# Altium PCB PowerBoardPCBRev1.PcbDoc
Units mm, origin at the board's own origin, x right, y up, seen from the top; angles counter-clockwise.
Board outline 40 x 40 mm, 2 copper layers (Top Layer, Bottom Layer); 8 components, 12 nets, 39 pads, 0 vias.
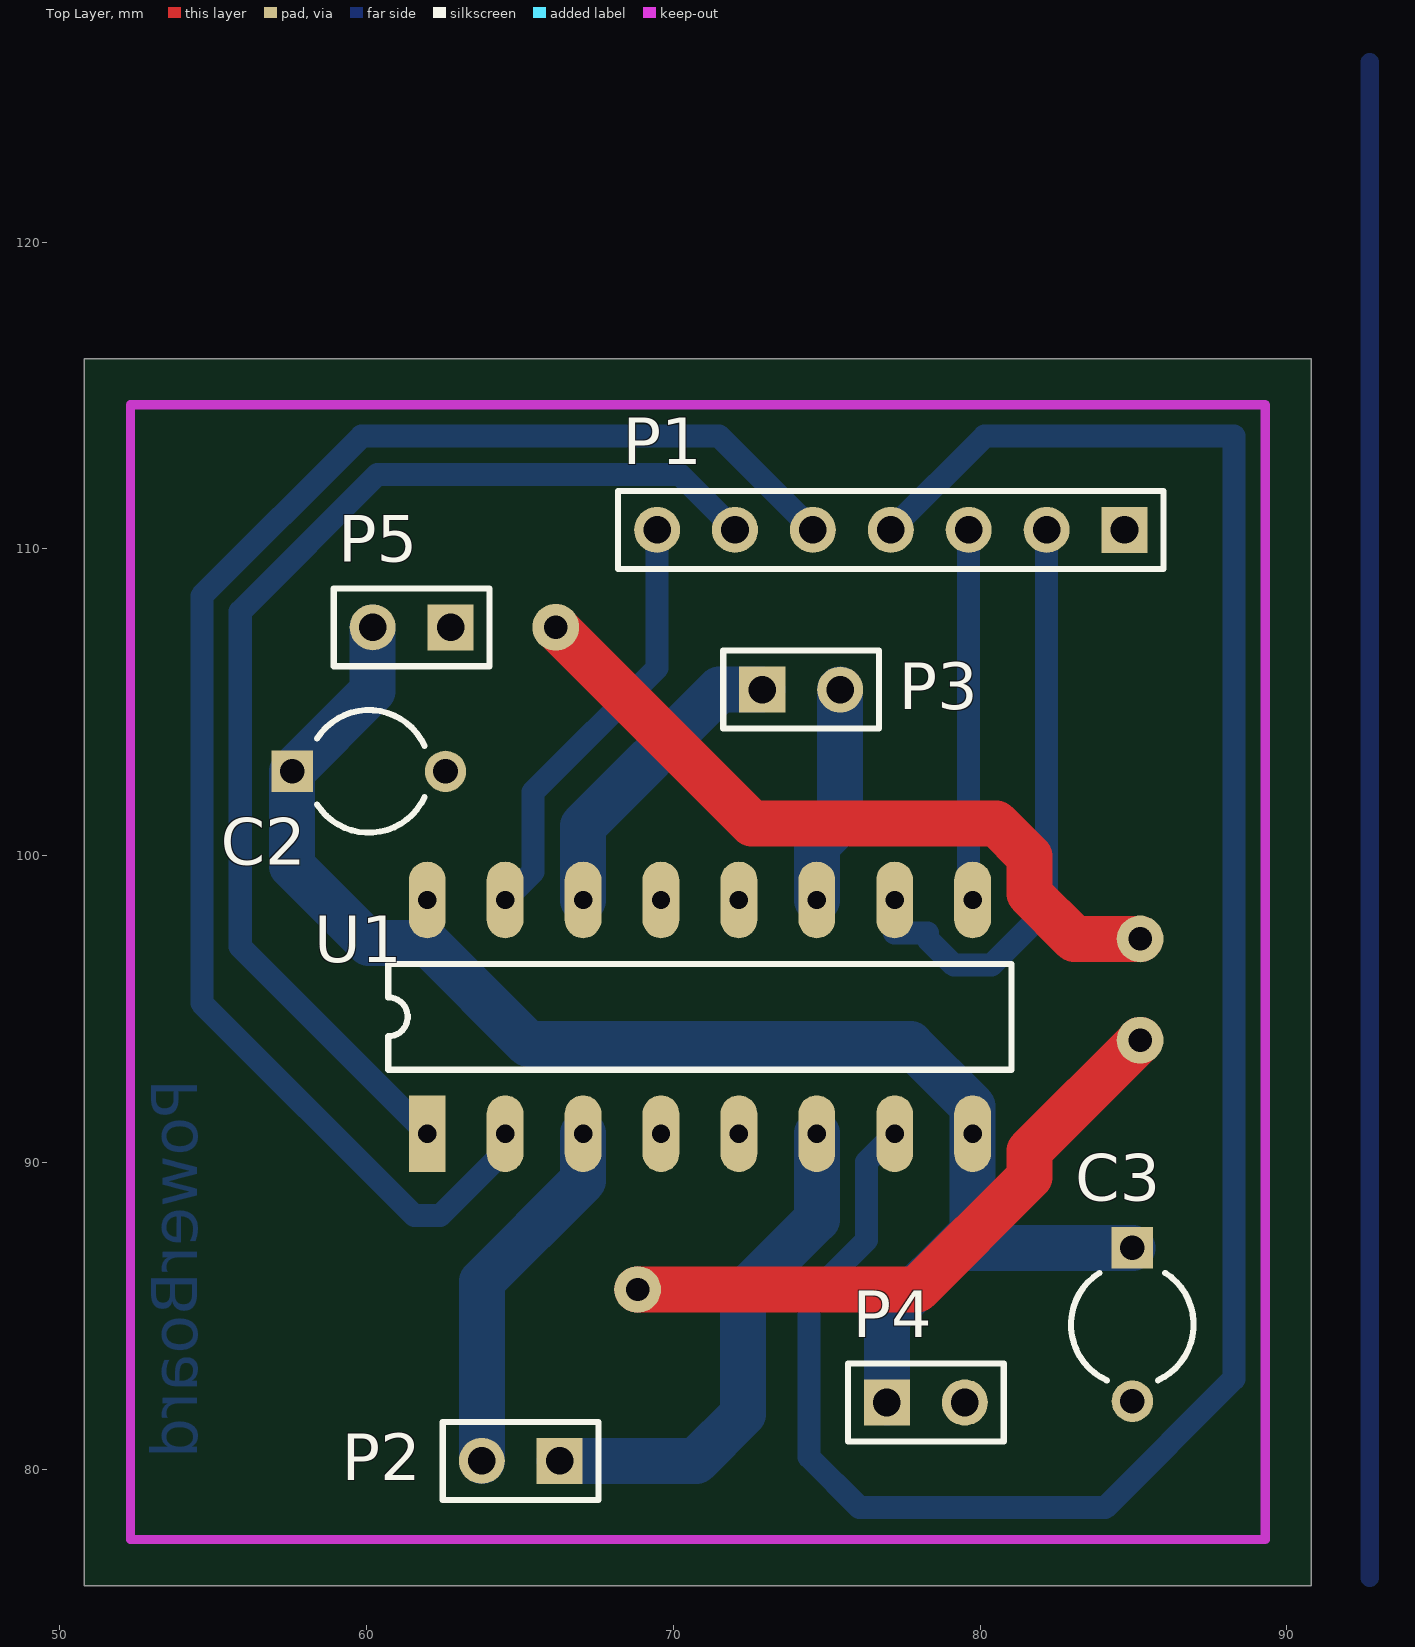
[diagram p0: Top Layer view]
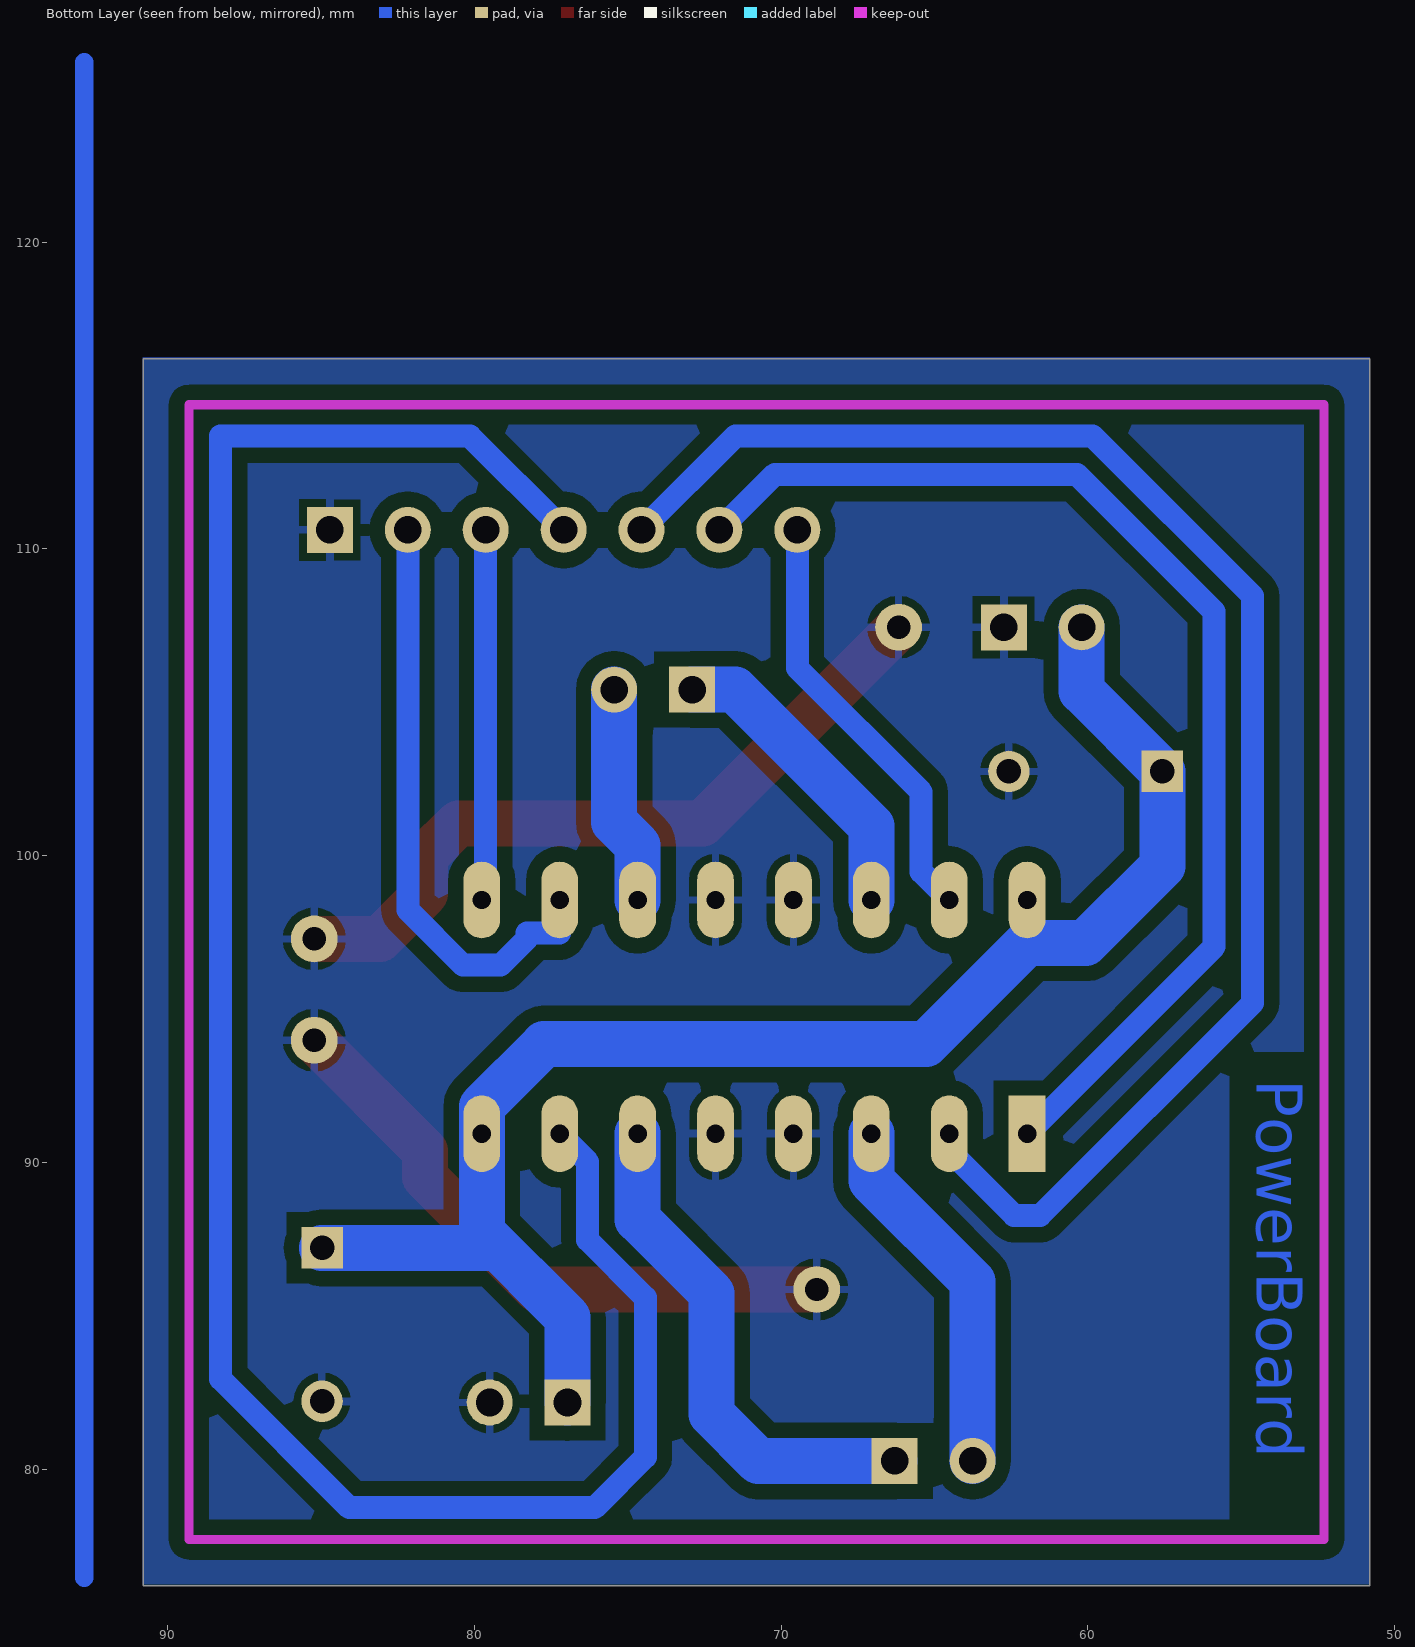
[diagram p1: Bottom Layer view, seen from below]

## Layer stack, top to bottom
Top Solder: solder mask 0.0102, Solder Resist, Dk 3.5
Top Layer: signal copper 0.0356
Dielectric 1: dielectric 0.32, FR-4, Dk 4.8
Bottom Layer: signal copper 0.0356
Bottom Solder: solder mask 0.0102, Solder Resist, Dk 3.5

## Board outline
50.8,76.2 90.8,76.2 90.8,116.2 50.8,116.2

## Design rules (kind name [scope] priority, off if disabled: settings)
Clearance [All] p1: gap=0.5
PolygonConnect [All] p1: connectstyle=Relief reliefconductorwidth=0.254 reliefentries=4 polygonreliefangle="90 Angle" airgapwidth=0.254
RoutingVias [All] p1: holewidth=0.8 width=1.6 viastyle="Through Hole" minholewidth=0.711 minwidth=1.27 maxholewidth=0.711 maxwidth=1.27
SolderMaskExpansion [All] p1: expansion=0.102
Width [All] p1: maxlimit=1.5 minlimit=0.6 preferedwidth=0.75
30 further rules are at their usual default settings.

## Components (designator, comment, footprint, x,y, rotation, side; value= is the part's Value field where it differs from the comment)
C2 "1uF" CAPR5-4X5 60.071,102.743 r0 top
C3 "1uF" CAPR5-4X5 84.963,84.709 r270 top
P1 "POWERBOARD_HEADER" HDR1X7 84.709,110.617 r180 top
P2 "LEFT_MOTOR_CONNECTOR" HDR1X2 66.294,80.264 r180 top
P3 "RIGHT_MOTOR_CONNECTOR" HDR1X2 72.898,105.41 r0 top
P4 "V_BAT" HDR1X2 76.962,82.169 r0 top
P5 "V_EXT_CONNECTOR" HDR1X2 62.738,107.442 r180 top
U1 "L293DNE Motor Driver" "DIP16 (NE)" 61.976,90.932 r90 top

## Footprints (in the part's own frame and the unit in brackets; to place one, negate y for a bottom-side part, rotate by r counter-clockwise, add the part's x,y. Pads: shape width x height; smd on the part's side, far side on the other; paste and mask are expansions set on the pad)
CAPR5-4X5 [mm] "Capacitor; 2 Leads"
  rect 1.35x1.35 hole 0.8: 1(-2.5,0)
  round 1.35 hole 0.8: 2(2.5,0)
  silkscreen extent -1.69,-2 1.82,2
"DIP16 (NE)" [mm]
  rect 2.5x1.2 hole 0.6: 1(0,0)
  oval 2.5x1.2 hole 0.6: 2(0,-2.54) 3(0,-5.08) 4(0,-7.62) 5(0,-10.16) 6(0,-12.7) 7(0,-15.24) 8(0,-17.78) 9(7.62,-17.78) 10(7.62,-15.24) 11(7.62,-12.7) 12(7.62,-10.16) 13(7.62,-7.62) 14(7.62,-5.08) 15(7.62,-2.54) 16(7.62,0)
  silkscreen extent 2.08,-19.05 5.54,1.27
HDR1X2 [mm] "Connector; Header; 2 Position"
  rect 1.5x1.5 hole 0.9: 1(0,0)
  round 1.5 hole 0.9: 2(2.54,0)
  silkscreen extent -1.27,-1.27 3.81,1.27
HDR1X7 [mm] "Connector; Header; 7 Position"
  rect 1.5x1.5 hole 0.9: 1(0,0)
  round 1.5 hole 0.9: 2(2.54,0) 3(5.08,0) 4(7.62,0) 5(10.16,0) 6(12.7,0) 7(15.24,0)
  silkscreen extent -1.27,-1.27 16.51,1.27

## Part data
C2 C3: library part Cap2, "Capacitor"
P1: library part "Header 7", "Header, 7-Pin"
P2 P3 P4 P5: library part "Header 2", "Header, 2-Pin"
U1: library part L293DNE, "TI L293DNE Quad H-bridge Motor Driver"

## Free pads (board coordinates)
  round 1.524 hole 0.762: 2(66.167,107.442) 2(68.834,85.852) 2(85.217,93.98) 2(85.217,97.282)

## Nets (pads, with @x,y where several pads share a name; then routed paths per layer and width w, separated by ;. In a path a pad name is that pad's centre, name@x,y a point inside that pad or via, vN(x,y) a via of type N, cw(c..) or ccw(c..) an arc to the next point about the centre after c; other vN are vias at no path point)
GND: C2.2 C3.2 P1.1 P4.2 P5.1 pad.2 U1.4 U1.5 U1.12 U1.13 | length 44.2
  Top Layer w1.5: pad.2@66.167,107.442 72.557,101.052 80.522,101.052 81.606,99.968 81.606,98.755 83.079,97.282 pad.2@85.217,97.282 ; pad.2@68.834,85.852 77.942,85.852 81.606,89.516 81.606,90.369 pad.2@85.217,93.98
LEFT_EN: P1.6 U1.1 | length 38.3
  Bottom Layer w0.75: U1.1 55.88,97.028 55.88,107.95 60.355,112.425 70.201,112.425 P1.6
MOTORSIG_LF: P1.5 U1.2 | length 51
  Bottom Layer w0.75: U1.2 64.726,90.722 64.726,90.595 62.396,88.265 61.556,88.265 54.63,95.191 54.63,108.468 59.837,113.675 71.491,113.675 P1.5
MOTORSIG_LR: P1.4 U1.7 | length 71.2
  Bottom Layer w0.75: P1.4 80.147,113.675 88.275,113.675 88.275,82.941 84.074,78.74 76.073,78.74 74.422,80.391 74.422,85.586 76.301,87.465 76.301,90.017 U1.7
MOTORSIG_RF: P1.7 U1.15 | length 14.1
  Bottom Layer w0.75: U1.15 65.431,99.467 65.431,102.077 69.469,106.115 P1.7
MOTORSIG_RR: P1.2 U1.10 | length 20.1
  Bottom Layer w0.75: U1.10@77.216,98.933 U1.10 77.216,97.477 78.281,97.477 78.281,97.291 79.145,96.427 80.367,96.427 82.169,98.229 P1.2
NetP2_1: P2.1 U1.6 | length 16.7
  Bottom Layer w1.5: P2.1 70.739,80.264 72.263,81.788 72.263,85.725 74.676,88.138 U1.6
NetP2_2: P2.2 U1.3 | length 12
  Bottom Layer w1.5: P2.2 63.754,86.106 67.056,89.408 U1.3
NetP3_1: P3.1 U1.14 | length 10.1
  Bottom Layer w1.5: U1.14 67.056,100.965 71.501,105.41 P3.1
NetP3_2: P3.2 U1.11 | length 7.2
  Bottom Layer w1.5: U1.11 74.676,100.33 75.438,101.092 P3.2
RIGHT_EN: P1.3 U1.9 | length 11.9
  Bottom Layer w0.75: U1.9@79.629,98.679 P1.3
VBAT: C2.1 C3.1 P4.1 P5.2 U1.8 U1.16 | length 50.8
  Bottom Layer w1.5: P5.2 60.198,105.37 C2.1 57.571,99.655 60.071,97.155 61.976,97.155 65.278,93.853 77.724,93.853 79.756,91.821 79.756,87.732 76.962,84.938 P4.1 ; 79.233,87.209 C3.1
copper on no net: | length 49.4
  Bottom Layer w0.6: 92.71,76.454 92.71,125.857

## Polygon pours and split planes (outlines as drawn)
GND on Bottom Layer "Bottom Layer-GND" (solid, pour order 10): 50.806,116.239 50.806,76.239 90.806,76.239 90.806,116.239

## Keep-outs
Keep-Out Layer:
  lines w0.3: 52.3,77.7 52.3,114.7 89.3,114.7 89.3,77.7 52.3,77.7

## Other copper
Bottom Layer:
  text "PowerBoard" at 54.483,92.71 h1.5 r90

## Dimensions
52.3,77.7 to 52.3,114.7 on Mechanical 1
52.3,77.7 to 89.3,77.7 on Mechanical 1